# Altium PCB PCB1.PcbDoc
Units mm, origin at the board's own origin, x right, y up, seen from the top; angles counter-clockwise.
Board outline 53.09 x 51.56 mm, 2 copper layers (Top Layer, Bottom Layer); 74 components, 24 nets, 160 pads, 61 vias.
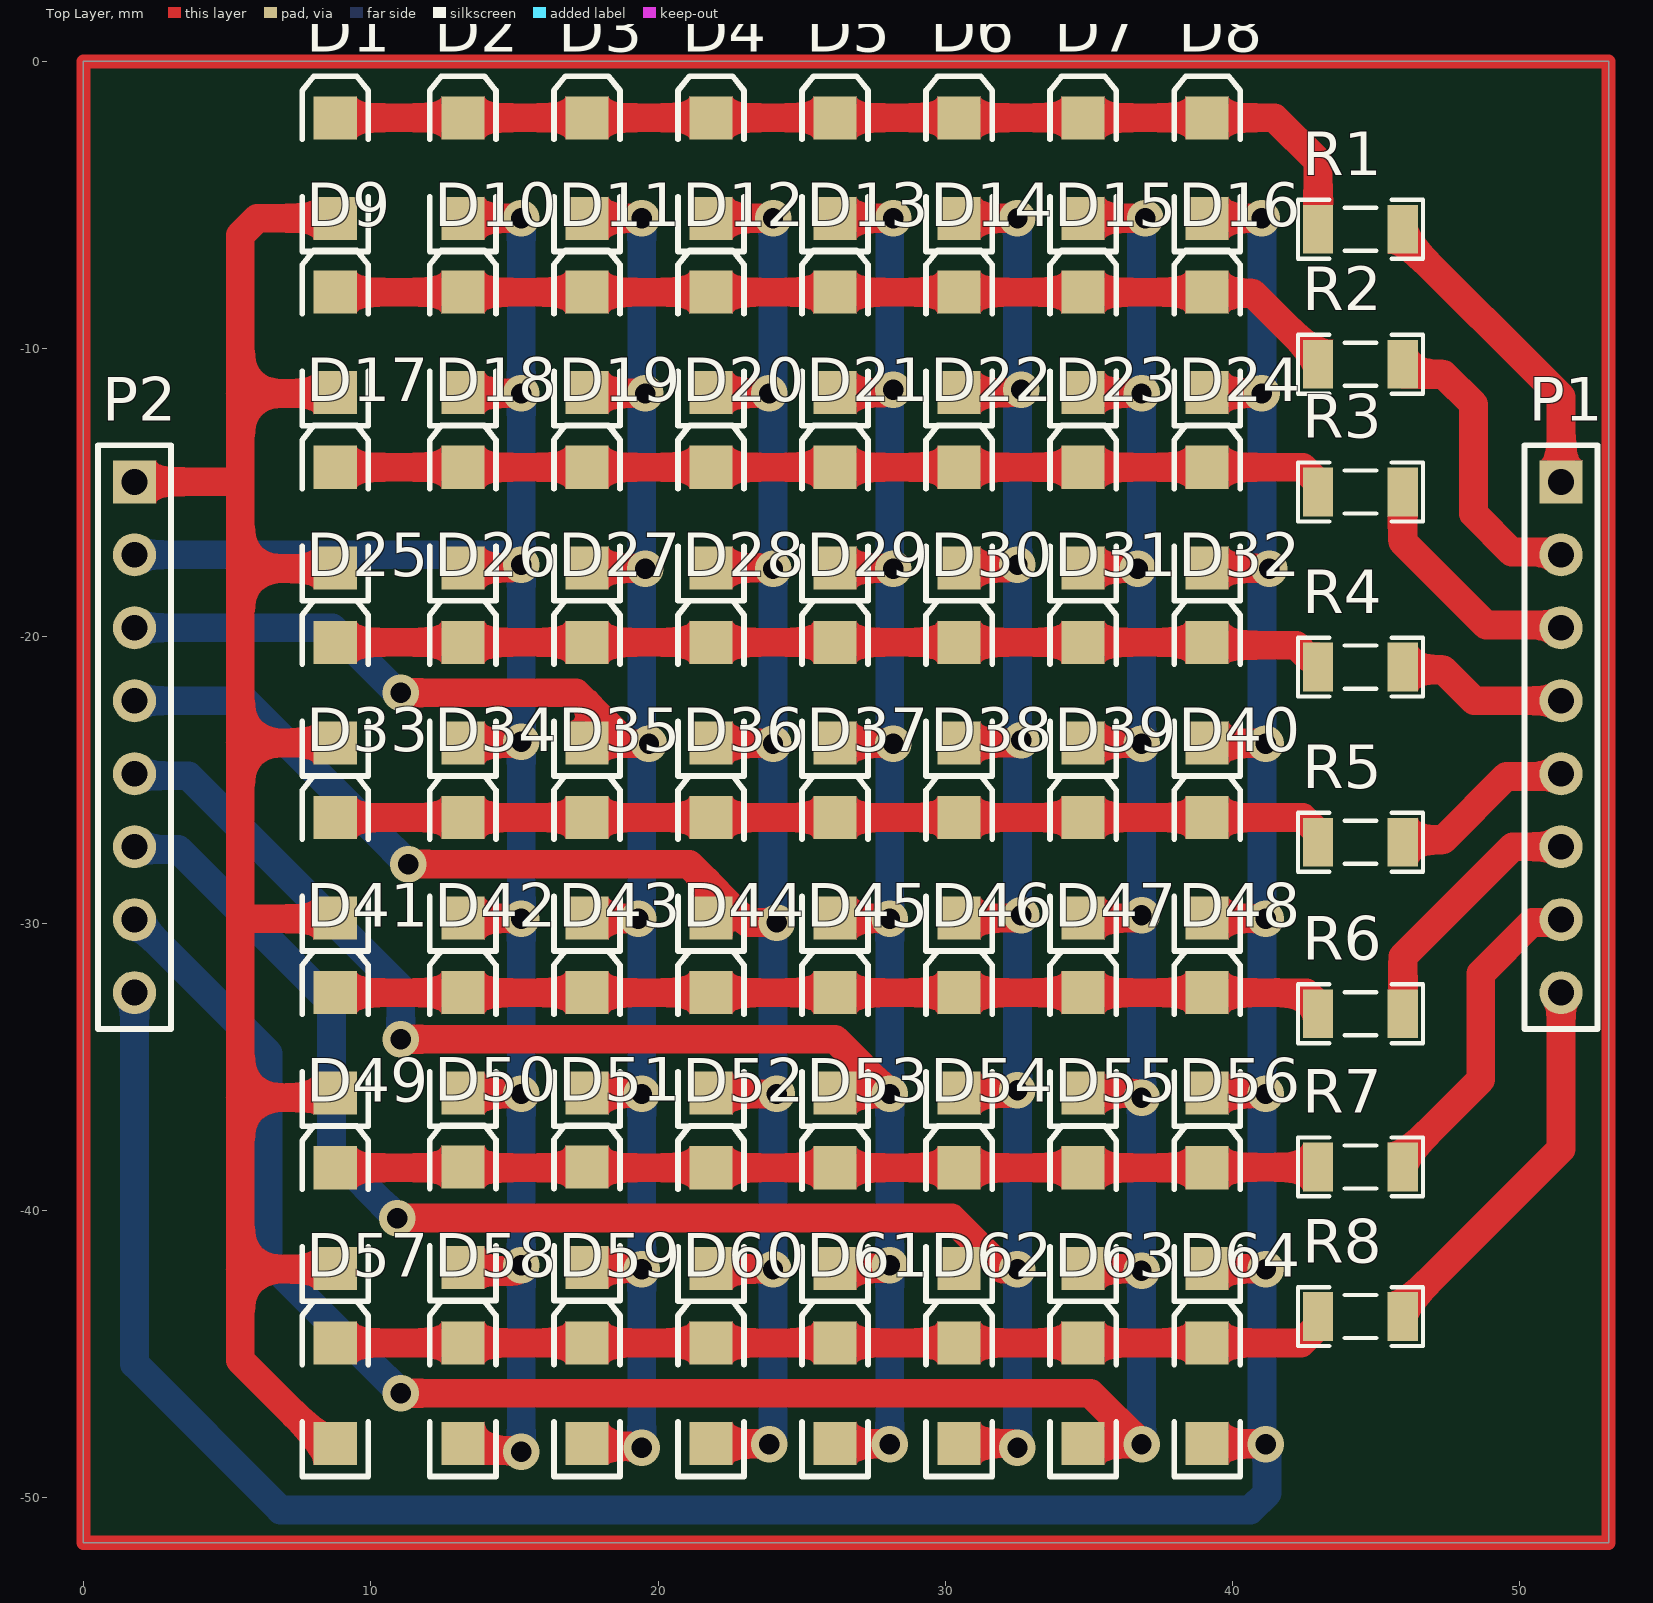
[diagram p0: Top Layer view]
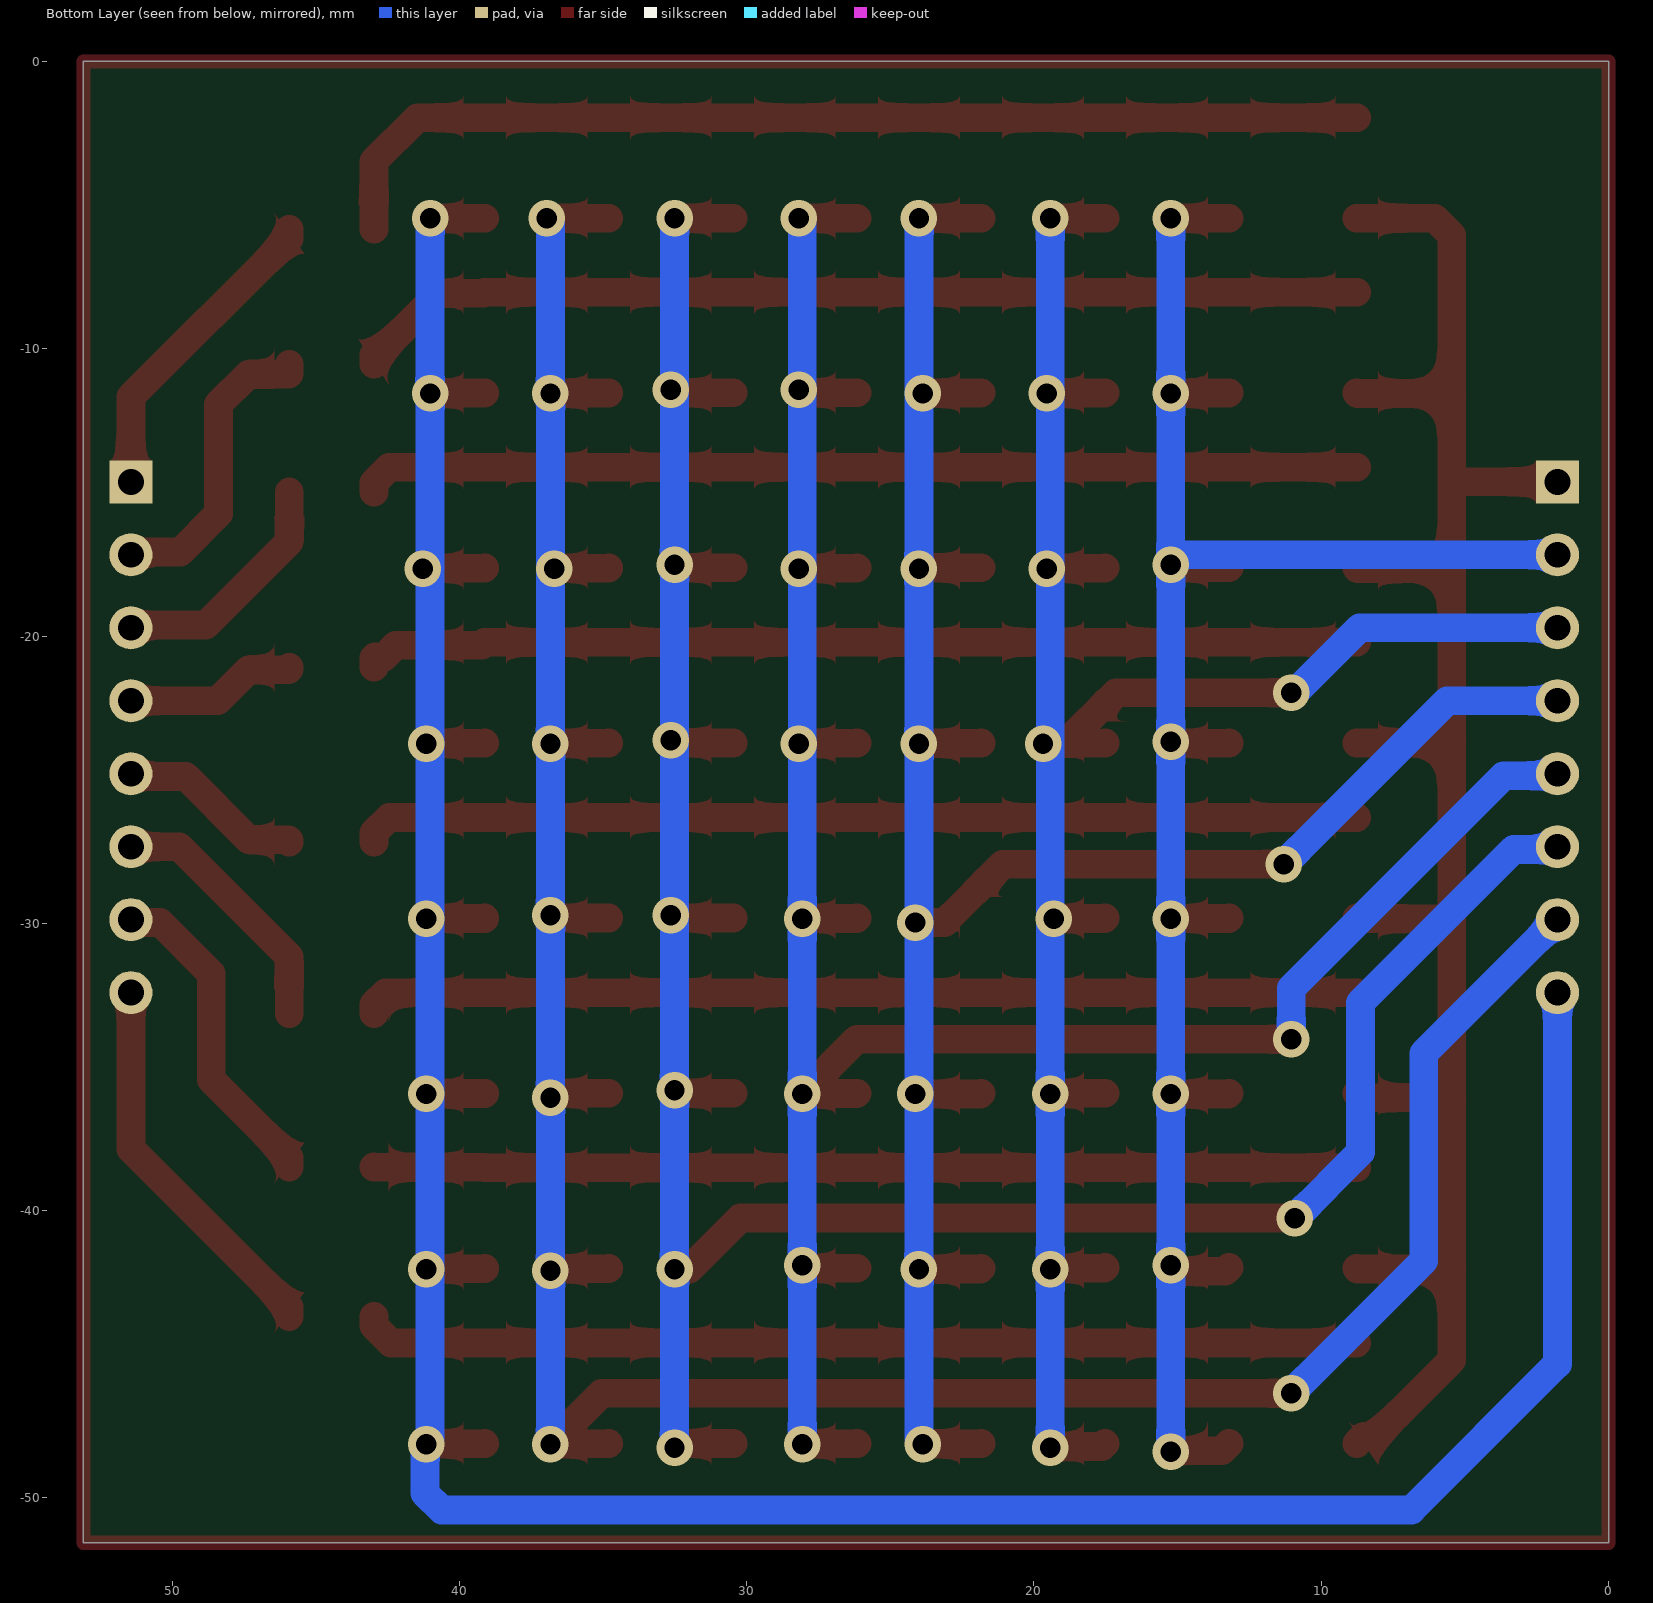
[diagram p1: Bottom Layer view, seen from below]
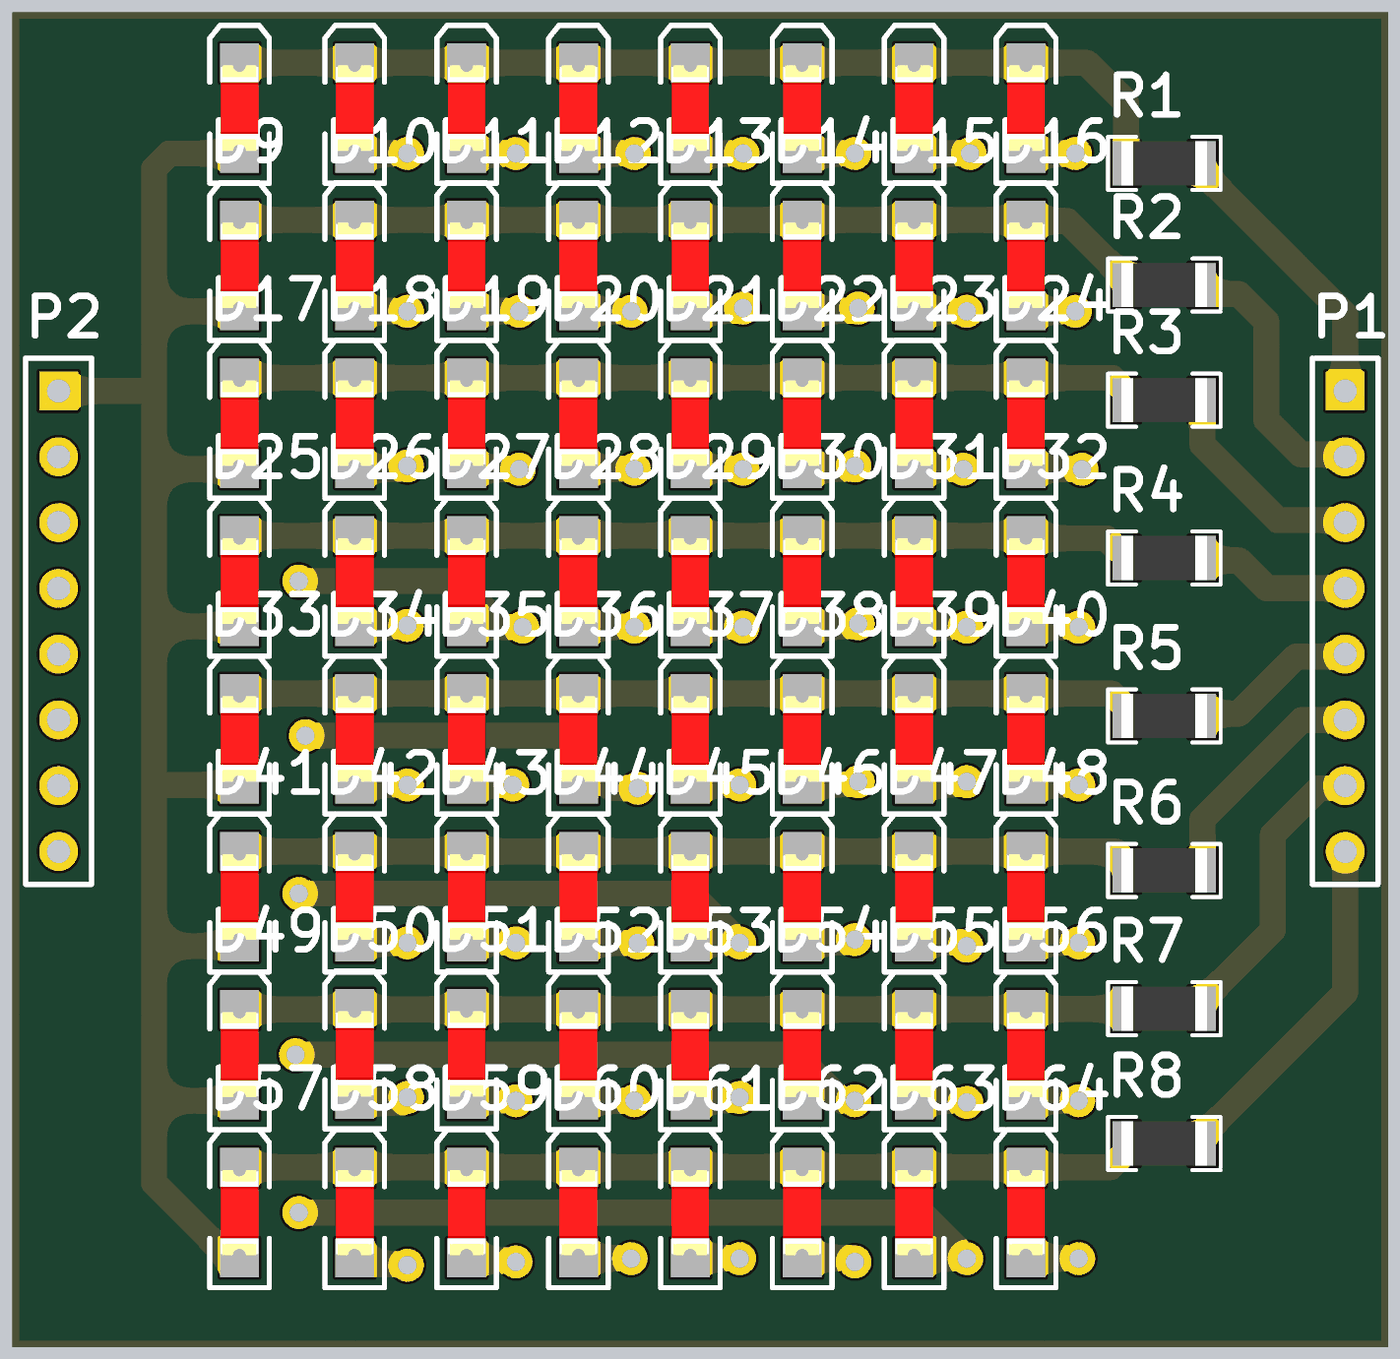
[diagram p2: 3D render of the assembled board from above, using the file's embedded part models]

## Layer stack, top to bottom
Top Solder: solder mask 0.0102, Solder Resist, Dk 3.5
Top Layer: signal copper 0.0356
Dielectric 1: dielectric 0.32, FR-4, Dk 4.8
Bottom Layer: signal copper 0.0356
Bottom Solder: solder mask 0.0102, Solder Resist, Dk 3.5

## Board outline
0,-51.562 0,0 53.086,0 53.086,-51.562

## Design rules (kind name [scope] priority, off if disabled: settings)
Clearance [All] p1: gap=0.254 ignorepadtopadclearanceinfootprint=FALSE except(0: Arc-Hole Track-Hole SMDPad-Hole THPad-Hole Via-Hole Fill-Hole Poly-Hole Region-Hole Text-Hole)
PolygonConnect [All] p1: connectstyle=Relief reliefconductorwidth=0.254 reliefentries=4 polygonreliefangle="90 Angle" airgapwidth=0.254
RoutingVias [All] p1: holewidth=0.711 width=1.27 viastyle="Through Hole" minholewidth=0.711 minwidth=1.27 maxholewidth=0.711 maxwidth=1.27
SolderMaskExpansion [All] p1: expansion=0.102 istentingtop=FALSE
Width [All] p1: maxlimit=1 minlimit=0.5 preferedwidth=0.7
30 further rules are at their usual default settings.

## Components (designator, comment, footprint, x,y, rotation, side; value= is the part's Value field where it differs from the comment)
D1 "SMD 1206 LED" "LED 1206" 8.763,-3.711 r90 top
D2 "SMD 1206 LED" "LED 1206" 13.208,-3.711 r90 top
D3 "SMD 1206 LED" "LED 1206" 17.526,-3.711 r90 top
D4 "SMD 1206 LED" "LED 1206" 21.844,-3.711 r90 top
D5 "SMD 1206 LED" "LED 1206" 26.162,-3.711 r90 top
D6 "SMD 1206 LED" "LED 1206" 30.48,-3.711 r90 top
D7 "SMD 1206 LED" "LED 1206" 34.798,-3.711 r90 top
D8 "SMD 1206 LED" "LED 1206" 39.116,-3.711 r90 top
D9 "SMD 1206 LED" "LED 1206" 8.763,-9.779 r90 top
D10 "SMD 1206 LED" "LED 1206" 13.208,-9.779 r90 top
D11 "SMD 1206 LED" "LED 1206" 17.526,-9.779 r90 top
D12 "SMD 1206 LED" "LED 1206" 21.844,-9.779 r90 top
D13 "SMD 1206 LED" "LED 1206" 26.162,-9.779 r90 top
D14 "SMD 1206 LED" "LED 1206" 30.48,-9.779 r90 top
D15 "SMD 1206 LED" "LED 1206" 34.798,-9.779 r90 top
D16 "SMD 1206 LED" "LED 1206" 39.116,-9.779 r90 top
D17 "SMD 1206 LED" "LED 1206" 8.763,-15.875 r90 top
D18 "SMD 1206 LED" "LED 1206" 13.208,-15.875 r90 top
D19 "SMD 1206 LED" "LED 1206" 17.526,-15.875 r90 top
D20 "SMD 1206 LED" "LED 1206" 21.844,-15.875 r90 top
D21 "SMD 1206 LED" "LED 1206" 26.162,-15.875 r90 top
D22 "SMD 1206 LED" "LED 1206" 30.48,-15.875 r90 top
D23 "SMD 1206 LED" "LED 1206" 34.798,-15.875 r90 top
D24 "SMD 1206 LED" "LED 1206" 39.116,-15.875 r90 top
D25 "SMD 1206 LED" "LED 1206" 8.763,-21.971 r90 top
D26 "SMD 1206 LED" "LED 1206" 13.208,-21.971 r90 top
D27 "SMD 1206 LED" "LED 1206" 17.526,-21.971 r90 top
D28 "SMD 1206 LED" "LED 1206" 21.844,-21.971 r90 top
D29 "SMD 1206 LED" "LED 1206" 26.162,-21.971 r90 top
D30 "SMD 1206 LED" "LED 1206" 30.48,-21.971 r90 top
D31 "SMD 1206 LED" "LED 1206" 34.798,-21.971 r90 top
D32 "SMD 1206 LED" "LED 1206" 39.116,-21.971 r90 top
D33 "SMD 1206 LED" "LED 1206" 8.763,-28.067 r90 top
D34 "SMD 1206 LED" "LED 1206" 13.208,-28.067 r90 top
D35 "SMD 1206 LED" "LED 1206" 17.526,-28.067 r90 top
D36 "SMD 1206 LED" "LED 1206" 21.844,-28.067 r90 top
D37 "SMD 1206 LED" "LED 1206" 26.162,-28.067 r90 top
D38 "SMD 1206 LED" "LED 1206" 30.48,-28.067 r90 top
D39 "SMD 1206 LED" "LED 1206" 34.798,-28.067 r90 top
D40 "SMD 1206 LED" "LED 1206" 39.116,-28.067 r90 top
D41 "SMD 1206 LED" "LED 1206" 8.763,-34.163 r90 top
D42 "SMD 1206 LED" "LED 1206" 13.208,-34.163 r90 top
D43 "SMD 1206 LED" "LED 1206" 17.526,-34.163 r90 top
D44 "SMD 1206 LED" "LED 1206" 21.844,-34.163 r90 top
D45 "SMD 1206 LED" "LED 1206" 26.162,-34.163 r90 top
D46 "SMD 1206 LED" "LED 1206" 30.48,-34.163 r90 top
D47 "SMD 1206 LED" "LED 1206" 34.798,-34.163 r90 top
D48 "SMD 1206 LED" "LED 1206" 39.116,-34.163 r90 top
D49 "SMD 1206 LED" "LED 1206" 8.763,-40.259 r90 top
D50 "SMD 1206 LED" "LED 1206" 13.208,-40.231 r90 top
D51 "SMD 1206 LED" "LED 1206" 17.526,-40.231 r90 top
D52 "SMD 1206 LED" "LED 1206" 21.844,-40.259 r90 top
D53 "SMD 1206 LED" "LED 1206" 26.162,-40.259 r90 top
D54 "SMD 1206 LED" "LED 1206" 30.48,-40.259 r90 top
D55 "SMD 1206 LED" "LED 1206" 34.798,-40.259 r90 top
D56 "SMD 1206 LED" "LED 1206" 39.116,-40.259 r90 top
D57 "SMD 1206 LED" "LED 1206" 8.763,-46.355 r90 top
D58 "SMD 1206 LED" "LED 1206" 13.208,-46.355 r90 top
D59 "SMD 1206 LED" "LED 1206" 17.526,-46.355 r90 top
D60 "SMD 1206 LED" "LED 1206" 21.844,-46.355 r90 top
D61 "SMD 1206 LED" "LED 1206" 26.162,-46.355 r90 top
D62 "SMD 1206 LED" "LED 1206" 30.48,-46.355 r90 top
D63 "SMD 1206 LED" "LED 1206" 34.798,-46.355 r90 top
D64 "SMD 1206 LED" "LED 1206" 39.116,-46.355 r90 top
P1 "Header 8" HDR1X8 51.435,-14.633 r270 top
P2 "Header 8" HDR1X8 1.778,-14.633 r270 top
R1 "330" RES1206 44.45,-5.842 r180 top
R2 "330" RES1206 44.45,-10.541 r180 top
R3 "330" RES1206 44.45,-14.986 r180 top
R4 "330" RES1206 44.45,-21.082 r180 top
R5 "330" RES1206 44.45,-27.178 r180 top
R6 "330" RES1206 44.45,-33.147 r180 top
R7 "330" RES1206 44.45,-38.481 r180 top
R8 "330" RES1206 44.45,-43.688 r180 top

## Footprints (in the part's own frame and the unit in brackets; to place one, negate y for a bottom-side part, rotate by r counter-clockwise, add the part's x,y. Pads: shape width x height; smd on the part's side, far side on the other; paste and mask are expansions set on the pad)
HDR1X8 [mm] "Connector; Header; 8 Position"
  rect 1.5x1.5 hole 0.9: 1(0,0)
  round 1.5 hole 0.9: 2(2.54,0) 3(5.08,0) 4(7.62,0) 5(10.16,0) 6(12.7,0) 7(15.24,0) 8(17.78,0)
  silkscreen extent -1.27,-1.27 19.05,1.27
"LED 1206" [mm]
  rect 1.5x1.5 smd: 1(-1.75,0) 2(1.75,0)
  silkscreen extent -2.9,-1.15 3.2,1.15, body extent -1.65,-0.72 1.65,0.73, height 1.36
RES1206 [mm] "Chip Resistor, 2-Leads, Body 3/20x1/60mm, IPC Medium Density DESIGNER:ABBAS BASEREH"
  rect 1.05x1.7 smd: 1(-1.475,0) 2(1.475,0)
  silkscreen extent -2.17,-1.02 2.17,1.02, body extent -1.65,-0.85 1.65,0.85, height 0.94

## Part data
D1 D2 D3 D4 D5 D6 D7 D8 D9 D10 D11 D12 D13 D14 D15 D16 D17 D18 D19 D20 D21 D22 D23 D24 D25 D26 D27 D28 D29 D30 D31 D32 D33 D34 D35 D36 D37 D38 D39 D40 D41 D42 D43 D44 D45 D46 D47 D48 D49 D50 D51 D52 D53 D54 D55 D56 D57 D58 D59 D60 D61 D62 D63 D64: library part "LED SMD 1206"
P1 P2: "Header, 8-Pin", LatestRevisionDate=17-Jul-2002, LatestRevisionNote="Re-released for DXP Platform.", Publisher="Altium Limited"
R1 R2 R3 R4 R5 R6 R7 R8: library part "RES SMD PACKAGE", "TOTAL SMD RESISTOR PACK", Data=2017-3-10, Desc.="RES SMD PAKAGES", Designer="Abbas Basereh"

## Via types
v1: diameter 1.27, hole 0.711, Top Layer to Bottom Layer, 61 vias

## Nets (pads, with @x,y where several pads share a name; then routed paths per layer and width w, separated by ;. In a path a pad name is that pad's centre, name@x,y a point inside that pad or via, vN(x,y) a via of type N, cw(c..) or ccw(c..) an arc to the next point about the centre after c; other vN are vias at no path point)
NetD1_1: D1.1 D9.1 D17.1 D25.1 D33.1 D41.1 D49.1 D57.1 P2.1 | length 70.9
  Top Layer w1: P2.1 5.369,-14.633 5.461,-14.541 ; D57.1 8.513,-47.855 8.104,-47.855 5.461,-45.212 5.461,-42.037 ; D49.1 8.735,-42.037 5.461,-42.037 ; D41.1 8.608,-36.068 5.461,-36.068 ; D33.1 8.541,-29.817 8.513,-29.845 5.588,-29.845 5.461,-29.972 ; D25.1 5.461,-23.721 ; D17.1 8.735,-17.653 5.461,-17.653 ; D9.1 8.735,-11.557 5.461,-11.557 ; D1.1 6.047,-5.461 5.461,-6.047 5.461,-11.557 ; 5.461,-42.037 5.461,-36.068 ; 5.461,-36.068 5.461,-29.972 ; 5.461,-29.972 5.461,-23.721 ; 5.461,-23.721 5.461,-17.653 ; 5.461,-17.653 5.461,-14.541 ; 5.461,-14.541 5.461,-11.557
NetD1_2: D1.2 D2.2 D3.2 D4.2 D5.2 D6.2 D7.2 D8.2 R1.2 | length 37.2
  Top Layer w1: D1.2 D2.2 D3.2 D4.2 D5.2 D6.2 D7.2 D8.2 41.458,-1.961 42.975,-3.478 R1.2
NetD2_1: D2.1 D10.1 D18.1 D26.1 D34.1 D42.1 D50.1 D58.1 P2.2 | length 73.1
  Top Layer w1: D58.1 13.458,-48.355 14.954,-48.355 14.986,-48.387 v1(15.24,-48.387) ; D50.1 13.339,-42.112 15.038,-42.112 v1(15.24,-41.91) ; D42.1 13.236,-35.941 v1(15.24,-35.941) ; D34.1 13.222,-29.831 15.226,-29.831 v1(15.24,-29.845) ; D26.1 13.222,-23.735 15.191,-23.735 v1(15.24,-23.685) ; D18.1 15.068,-17.625 15.167,-17.526 v1(15.24,-17.526) ; D10.1 13.222,-11.543 15.226,-11.543 v1(15.24,-11.557) ; D2.1 v1(15.24,-5.461)
  Bottom Layer w1: P2.2 14.814,-17.173 15.167,-17.526 v1(15.24,-17.526) ; v1(15.24,-48.387) v1(15.24,-29.845) v1(15.24,-23.685) v1(15.24,-17.526) ; v1(15.24,-5.461) v1(15.24,-11.557) v1(15.24,-17.526)
NetD3_1: D3.1 D11.1 D19.1 D27.1 D35.1 D43.1 D51.1 D59.1 P2.3 | length 77.4
  Top Layer w1: v1(11.049,-21.971) 17.145,-21.971 18.923,-23.749 v1(19.685,-23.749) ; D59.1 17.629,-48.208 19.379,-48.208 v1(19.431,-48.26) ; D51.1 17.554,-42.009 19.403,-42.009 v1(19.431,-42.037) ; D43.1 19.403,-35.913 v1(19.431,-35.941) ; D35.1 17.54,-29.831 19.29,-29.831 v1(19.304,-29.845) ; D27.1 17.54,-23.735 18.923,-23.735 ; D19.1 17.54,-17.639 19.544,-17.639 v1(19.558,-17.653) ; D11.1 17.54,-11.543 19.544,-11.543 v1(19.558,-11.557) ; D3.1 v1(19.431,-5.461)
  Bottom Layer w1: P2.3 8.664,-19.713 10.922,-21.971 v1(11.049,-21.971) ; v1(19.431,-48.26) v1(19.431,-42.037) v1(19.431,-35.941) v1(19.431,-5.461)
NetD4_1: D4.1 D12.1 D20.1 D28.1 D36.1 D44.1 D52.1 D60.1 P2.4 | length 83.3
  Top Layer w1: v1(11.303,-27.94) 21.082,-27.94 23.114,-29.972 v1(24.13,-29.972) ; D60.1 21.858,-48.119 23.862,-48.119 v1(23.876,-48.133) ; D52.1 21.872,-42.037 v1(24.003,-42.037) ; D44.1 21.872,-35.941 v1(24.13,-35.941) ; D28.1 21.858,-23.735 23.989,-23.735 v1(24.003,-23.749) ; D20.1 23.975,-17.625 v1(24.003,-17.653) ; D12.1 21.858,-11.543 23.862,-11.543 v1(23.876,-11.557) ; D4.1 v1(24.003,-5.461)
  Bottom Layer w1: P2.4 5.616,-22.253 v1(11.303,-27.94) ; v1(23.876,-48.133) 23.876,-48.06 24.003,-47.933 v1(24.003,-42.037) v1(24.003,-23.749) v1(24.003,-5.461)
NetD5_1: D5.1 D13.1 D21.1 D29.1 D37.1 D45.1 D53.1 D61.1 P2.5 | length 90.5
  Top Layer w1: v1(11.049,-34.036) 26.162,-34.036 28.053,-35.927 26.176,-35.927 D45.1 ; D61.1 26.176,-48.119 28.053,-48.119 v1(28.067,-48.133) ; D53.1 27.968,-42.009 v1(28.067,-41.91) ; D37.1 26.176,-29.831 28.053,-29.831 v1(28.067,-29.845) ; D29.1 26.176,-23.735 28.18,-23.735 v1(28.194,-23.749) ; D21.1 26.176,-17.639 28.18,-17.639 v1(28.194,-17.653) ; D13.1 28.022,-11.529 28.121,-11.43 v1(28.194,-11.43) ; D5.1 v1(28.194,-5.461)
  Bottom Layer w1: P2.5 1.847,-24.862 3.653,-24.862 11.047,-32.256 11.047,-34.034 v1(11.049,-34.036) ; v1(28.067,-48.133) v1(28.067,-41.91) v1(28.067,-35.941) v1(28.067,-29.845) 28.067,-5.661 28.194,-5.534 v1(28.194,-5.461)
NetD6_1: D6.1 D14.1 D22.1 D30.1 D38.1 D46.1 D54.1 D62.1 P2.6 | length 97.5
  Top Layer w1: v1(10.922,-40.259) 30.226,-40.259 32.004,-42.037 v1(32.512,-42.037) ; D62.1 32.284,-48.105 32.439,-48.26 v1(32.512,-48.26) ; D46.1 32.34,-35.913 32.439,-35.814 v1(32.512,-35.814) ; D38.1 32.467,-29.817 32.566,-29.718 v1(32.639,-29.718) ; D30.1 32.467,-23.721 32.566,-23.622 v1(32.639,-23.622) ; D22.1 32.34,-17.625 32.439,-17.526 v1(32.512,-17.526) ; D14.1 32.467,-11.529 32.566,-11.43 v1(32.639,-11.43) ; D6.1 v1(32.512,-5.461)
  Bottom Layer w1: P2.6 1.874,-27.429 3.299,-27.429 8.636,-32.766 8.636,-37.973 v1(10.922,-40.259) ; v1(32.512,-48.26) v1(32.512,-42.037) v1(32.512,-35.814) v1(32.512,-17.526) v1(32.512,-5.461)
NetD7_1: D7.1 D15.1 D23.1 D31.1 D39.1 D47.1 D55.1 D63.1 P2.7 | length 106
  Top Layer w1: v1(11.049,-46.355) 35.052,-46.355 36.816,-48.119 34.812,-48.119 D63.1 ; D55.1 34.812,-42.023 36.752,-42.023 v1(36.83,-42.1) ; D47.1 36.602,-35.913 36.757,-36.068 v1(36.83,-36.068) ; D39.1 36.658,-29.817 36.757,-29.718 v1(36.83,-29.718) ; D31.1 34.812,-23.735 36.816,-23.735 v1(36.83,-23.749) ; D23.1 34.812,-17.639 36.689,-17.639 v1(36.703,-17.653) ; D15.1 34.812,-11.543 36.816,-11.543 v1(36.83,-11.557) ; D7.1 v1(36.957,-5.461)
  Bottom Layer w1: P2.7 6.436,-34.531 6.436,-41.742 v1(11.049,-46.355) ; v1(36.83,-48.133) v1(36.83,-42.1) v1(36.83,-36.068) v1(36.83,-29.718) v1(36.83,-23.749) v1(36.83,-11.557) 36.83,-5.661 36.957,-5.534 v1(36.957,-5.461)
NetD8_1: D8.1 D16.1 D24.1 D32.1 D40.1 D48.1 D56.1 D64.1 P2.8 | length 115.4
  Top Layer w1: D64.1 39.13,-48.119 41.134,-48.119 v1(41.148,-48.133) ; D56.1 39.13,-42.023 41.134,-42.023 v1(41.148,-42.037) ; D48.1 39.13,-35.927 41.134,-35.927 v1(41.148,-35.941) ; D40.1 39.13,-29.831 41.134,-29.831 v1(41.148,-29.845) ; D32.1 39.13,-23.735 41.134,-23.735 v1(41.148,-23.749) ; D24.1 39.13,-17.639 41.261,-17.639 v1(41.275,-17.653) ; D16.1 39.13,-11.543 41.007,-11.543 v1(41.021,-11.557) ; D8.1 v1(41.021,-5.461)
  Bottom Layer w1: P2.8 1.778,-45.339 6.858,-50.419 40.614,-50.419 41.2,-49.833 41.2,-48.185 v1(41.148,-48.133) 41.148,-48.06 41.021,-47.933 v1(41.021,-11.557) v1(41.021,-5.461)
NetD9_2: D9.2 D10.2 D11.2 D12.2 D13.2 D14.2 D15.2 D16.2 R2.2 | length 35.4
  Top Layer w1: D9.2 D10.2 D11.2 D12.2 D13.2 D14.2 D15.2 D16.2 39.151,-8.064 40.703,-8.064 42.83,-10.191 42.95,-10.191 42.975,-10.216 R2.2
NetD17_2: D17.2 D18.2 D19.2 D20.2 D21.2 D22.2 D23.2 D24.2 R3.2 | length 34.8
  Top Layer w1: D17.2 D18.2 D19.2 D20.2 D21.2 D22.2 D23.2 D24.2 42.439,-14.125 42.975,-14.661 R3.2
NetD25_2: D25.2 D26.2 D27.2 D28.2 D29.2 D30.2 D31.2 D32.2 R4.2 | length 34.8
  Top Layer w1: D25.2 D26.2 D27.2 D28.2 D29.2 D30.2 D31.2 D32.2 39.215,-20.32 42.213,-20.32 42.625,-20.732 42.95,-20.732 42.975,-20.757 R4.2
NetD33_2: D33.2 D34.2 D35.2 D36.2 D37.2 D38.2 D39.2 D40.2 R5.2 | length 34.8
  Top Layer w1: D33.2 D34.2 D35.2 D36.2 D37.2 D38.2 D39.2 D40.2 42.439,-26.317 42.975,-26.853 R5.2
NetD41_2: D41.2 D42.2 D43.2 D44.2 D45.2 D46.2 D47.2 D48.2 R6.2 | length 34.7
  Top Layer w1: D41.2 D42.2 D43.2 D44.2 D45.2 D46.2 D47.2 D48.2 42.566,-32.413 42.975,-32.822 R6.2
NetD49_2: D49.2 D50.2 D51.2 D52.2 D53.2 D54.2 D55.2 D56.2 R7.2 | length 34.2
  Top Layer w1: D49.2 D52.2 D53.2 D54.2 D55.2 D56.2 39.13,-38.495 42.961,-38.495 R7.2
NetD57_2: D57.2 D58.2 D59.2 D60.2 D61.2 D62.2 D63.2 D64.2 R8.2 | length 34.8
  Top Layer w1: D57.2 D58.2 D59.2 D60.2 D61.2 D62.2 D63.2 D64.2 42.383,-44.605 42.975,-44.013 R8.2
NetP1_1: P1.1 R1.1 | length 11.1
  Top Layer w1: R1.1 45.925,-6.167 51.435,-11.677 P1.1
NetP1_2: P1.2 R2.1 | length 10.7
  Top Layer w1: R2.1 45.925,-10.866 45.95,-10.891 47.34,-10.891 48.387,-11.938 48.387,-15.748 49.716,-17.077 51.339,-17.077 P1.2
NetP1_3: P1.3 R3.1 | length 8.5
  Top Layer w1: R3.1 45.925,-16.715 48.827,-19.617 51.339,-19.617 P1.3
NetP1_4: P1.4 R4.1 | length 6
  Top Layer w1: R4.1 45.925,-21.146 45.95,-21.171 47.333,-21.171 48.415,-22.253 P1.4
NetP1_5: P1.5 R5.1 | length 6.5
  Top Layer w1: R5.1 45.925,-27.114 45.95,-27.089 47.333,-27.089 49.533,-24.889 51.339,-24.889 P1.5
NetP1_6: P1.6 R6.1 | length 9.1
  Top Layer w1: R6.1 45.925,-31.164 49.756,-27.333 P1.6
NetP1_7: P1.7 R7.1 | length 11.4
  Top Layer w1: R7.1 45.925,-38.156 48.641,-35.44 48.641,-31.75 50.422,-29.969 51.339,-29.969 P1.7
NetP1_8: P1.8 R8.1 | length 13.6
  Top Layer w1: R8.1 45.925,-43.363 51.435,-37.853 P1.8
copper on no net: | length 209.3
  Top Layer w0.5: 0,-51.562 0,0 53.086,0 53.086,-51.562 0,-51.562